# Altium PCB TPA2.PcbDoc
Units mm, origin at the board's own origin, x right, y up, seen from the top; angles counter-clockwise.
Board outline 16.86 x 38.7 mm, 2 copper layers (TopLayer, BottomLayer); 7 components, 8 nets, 26 pads, 0 vias.
Unrouted connection lines stored in the file: 1.
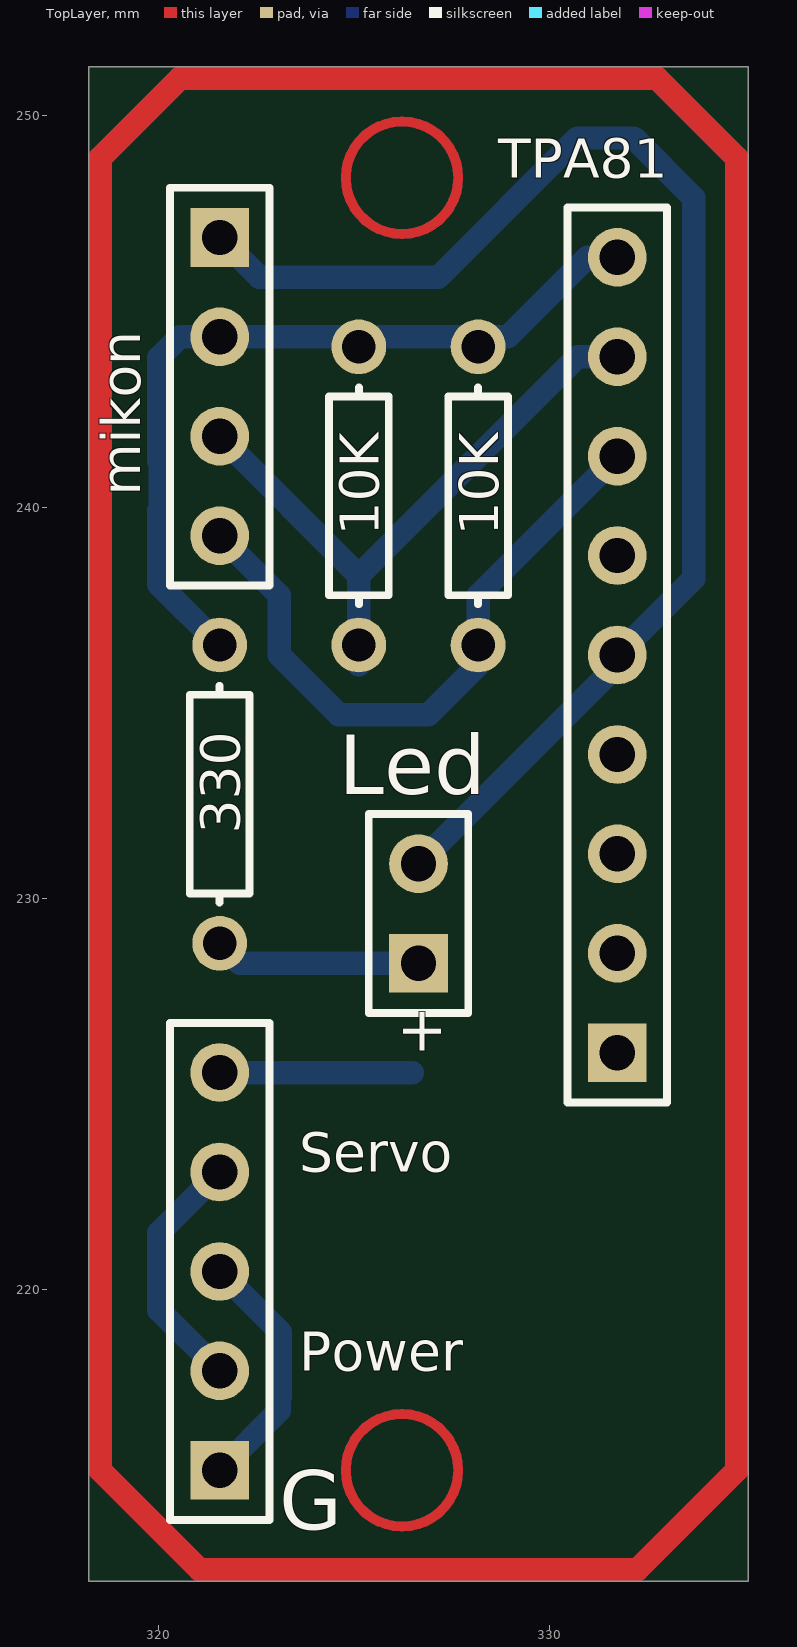
[diagram p0: TopLayer view]
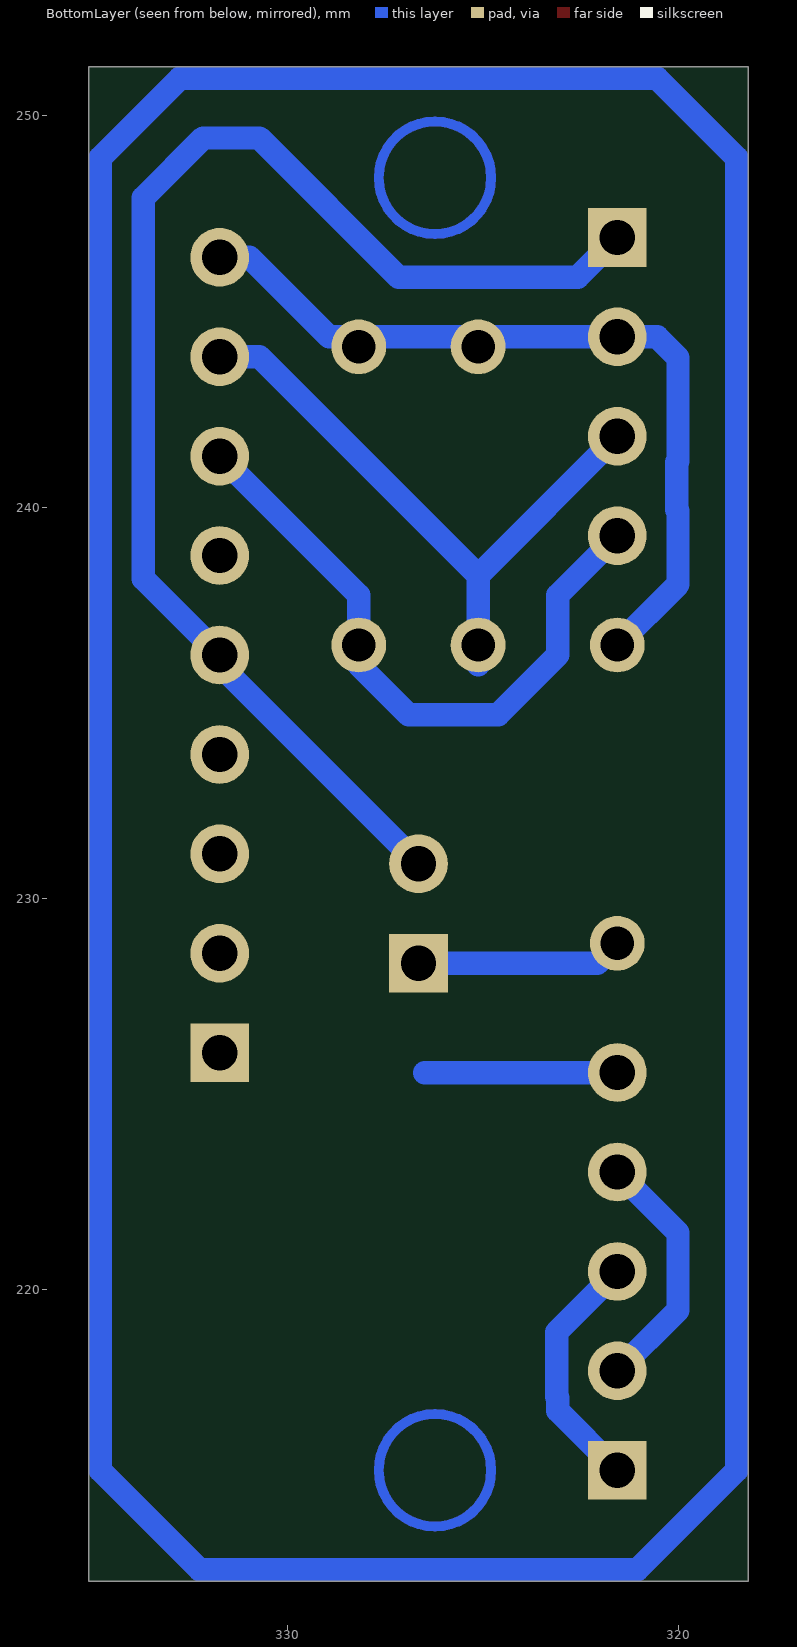
[diagram p1: BottomLayer view, seen from below]

## Layer stack, top to bottom
TopLayer: signal copper 0.0356
Dielectric: dielectric 0.32, FR-4, Dk 4.8
BottomLayer: signal copper 0.0356

## Board outline
318.216,212.552 335.072,212.552 335.072,251.252 318.216,251.252

## Design rules (kind name [scope] priority, off if disabled: settings)
Clearance Clearance_2 [InNamedPolygon('Bottom Layer-No Net')] p1: gap=0.9
Clearance Clearance_1 [InNamedPolygon('Bottom Layer-No Net')] p2: gap=0.8
Clearance [All] p3: gap=0.5
FabricationTestPointUsage TestPointUsage [All] p1: valid=0 allowmultiple=FALSE
FabricationTestpoint Testpoint [All] p1: side=3 testpointundercomponent=TRUE minsize=1.016 maxsize=2.54 preferedsize=1.524 minholesize=0.508 maxholesize=1.016 preferedholesize=0.813 testpointgrid=0.025 allowsidetop=TRUE allowsidebottom=TRUE usegrid=TRUE gridtolerance=0
PolygonConnect [All] p1: connectstyle=Relief reliefconductorwidth=0.254 reliefentries=4 polygonreliefangle="90 Angle"
RoutingLayers [All] p1: top layer_v5=FALSE bottom layer_v5=TRUE
RoutingVias [All] p1: holewidth=0.711 width=1.27 viastyle="Through Hole" minholewidth=0.711 minwidth=1.27 maxholewidth=0.711 maxwidth=1.27
SilkscreenOverComponentPads [All] p1: minsilkscreentomaskgap=0.254
SolderMaskExpansion [All] p1: expansion=0.102
Width [All] p1: maxlimit=1 minlimit=0.5 preferedwidth=0.6
24 further rules are at their usual default settings.

## Classes and differential pairs
component class TPA2: 10K 330 Led mikon Servo TPA81

## Components (designator, comment, footprint, x,y, rotation, side; value= is the part's Value field where it differs from the comment)
10K "Res1" AXIAL-0.3 325.12,240.284 r90 top (schematic designator 10K,)
10K "Res1" AXIAL-0.3 328.168,240.284 r90 top
330 "Res1" AXIAL-0.3 321.564,232.664 r90 top
Led "LED1" BAT-2 326.644,229.616 r90 top
mikon "Header 4" HDR1X4 321.564,246.888 r270 top (schematic designator P?)
Servo "Header 5" HDR1X5 321.564,215.392 r90 top
TPA81 "Header 9" HDR1X9 331.724,226.06 r90 top

## Footprints (in the part's own frame and the unit in brackets; to place one, negate y for a bottom-side part, rotate by r counter-clockwise, add the part's x,y. Pads: shape width x height; smd on the part's side, far side on the other; paste and mask are expansions set on the pad)
AXIAL-0.3 [mm] "Axial Device, Thru-Hole; 2 Leads; 0.3 in Pin Spacing"
  round 1.4 hole 0.85: 1(-3.81,0) 2(3.81,0)
  silkscreen extent -2.77,-0.76 2.77,0.76
BAT-2 [mm] "Multicell Battery; 2 Leads"
  rect 1.5x1.5 hole 0.9: 1(-1.27,0)
  round 1.5 hole 0.9: 2(1.27,0)
  silkscreen extent -2.54,-1.27 2.54,1.27
HDR1X4 [mm] "Connector; Header; 4 Position"
  rect 1.5x1.5 hole 0.9: 1(0,0)
  round 1.5 hole 0.9: 2(2.54,0) 3(5.08,0) 4(7.62,0)
  silkscreen extent -1.27,-1.27 8.89,1.27
HDR1X5 [mm] "Connector; Header; 5 Position"
  rect 1.5x1.5 hole 0.9: 1(0,0)
  round 1.5 hole 0.9: 2(2.54,0) 3(5.08,0) 4(7.62,0) 5(10.16,0)
  silkscreen extent -1.27,-1.27 11.43,1.27
HDR1X9 [mm] "Connector; Header; 9 Position"
  rect 1.5x1.5 hole 0.9: 1(0,0)
  round 1.5 hole 0.9: 2(2.54,0) 3(5.08,0) 4(7.62,0) 5(10.16,0) 6(12.7,0) 7(15.24,0) 8(17.78,0) 9(20.32,0)
  silkscreen extent -1.27,-1.27 21.59,1.27

## Part data
10K 10K 330: "Resistor"
Led: "Typical RED GaAs LED"
mikon: "Header, 4-Pin"
Servo: "Header, 5-Pin"
TPA81: "Header, 9-Pin"

## Nets (pads, with @x,y where several pads share a name; then routed paths per layer and width w, separated by ;. In a path a pad name is that pad's centre, name@x,y a point inside that pad or via, vN(x,y) a via of type N, cw(c..) or ccw(c..) an arc to the next point about the centre after c; other vN are vias at no path point)
Net10K,_1: 10K.1@325.12,236.474 mikon.3 TPA81.8 | length 16.2
  BottomLayer w0.6: mikon.3 325.12,238.252 ; 10K.1@325.12,235.966 325.12,238.252 ; TPA81.8 330.708,243.84 325.12,238.252
Net10K,_2: 10K.2 330.2 mikon.2 TPA81.9 | length 20.8
  BottomLayer w0.6: 330.2 320.014,238.024 320.014,239.91 320.04,239.936 320.04,241.14 320.014,241.166 320.014,243.814 320.548,244.348 mikon.2 328.93,244.348 330.962,246.38 TPA81.9
Net10K_1: 10K.1@328.168,236.474 mikon.4 TPA81.7 | length 16.7
  BottomLayer w0.6: mikon.4 323.088,237.744 323.088,236.22 324.612,234.696 326.898,234.696 328.168,235.966 328.168,237.744 TPA81.7
Net330_1: 330.1 Led.1 | length 5.8
  BottomLayer w0.6: 330.1 322.072,228.346 Led.1 Led.1@326.136,228.346
NetLed_2: Led.2 mikon.1 TPA81.5 | length 34.6
  BottomLayer w0.6: mikon.1 322.58,245.872 327.152,245.872 330.708,249.428 332.148,249.428 333.672,247.904 333.672,238.168 TPA81.5 331.724,235.966 Led.2
NetServo_1: Servo.1 Servo.3 | length 6.4
  BottomLayer w0.6: Servo.1 323.088,216.916 323.088,217.238 323.114,217.264 323.114,218.922 Servo.3
NetServo_2: Servo.2 Servo.4 | length 6.4
  BottomLayer w0.6: Servo.2 320.014,219.482 320.014,221.462 Servo.4
NetServo_5: Servo.5 TPA81.3 | length 4.9
  BottomLayer w0.6: Servo.5 326.481,225.552
pads on no net: TPA81.1 TPA81.2 TPA81.4 TPA81.6

## Other copper
MultiLayer:
  circle w0.254: c326.223,215.392 r1.437
  circle w0.254: c326.223,248.412 r1.437
  lines w0.6: 318.516,215.392 318.516,248.92 320.548,250.952 332.74,250.952 334.772,248.92 334.772,215.392 332.232,212.852 321.056,212.852 318.516,215.392

## Silkscreen, mask and mechanical layers (free items; w line width, h text height)
TopOverlay:
  text "Power" at 323.596,217.932 h1
  text "G" at 323.088,213.868 h1.52

## Text inside footprints (layer, text, board x,y; h text height)
Led: TopOverlay "+" at 327.221,225.946 h1.15 r90